# EAGLE board board (EAGLE 8.3.1)
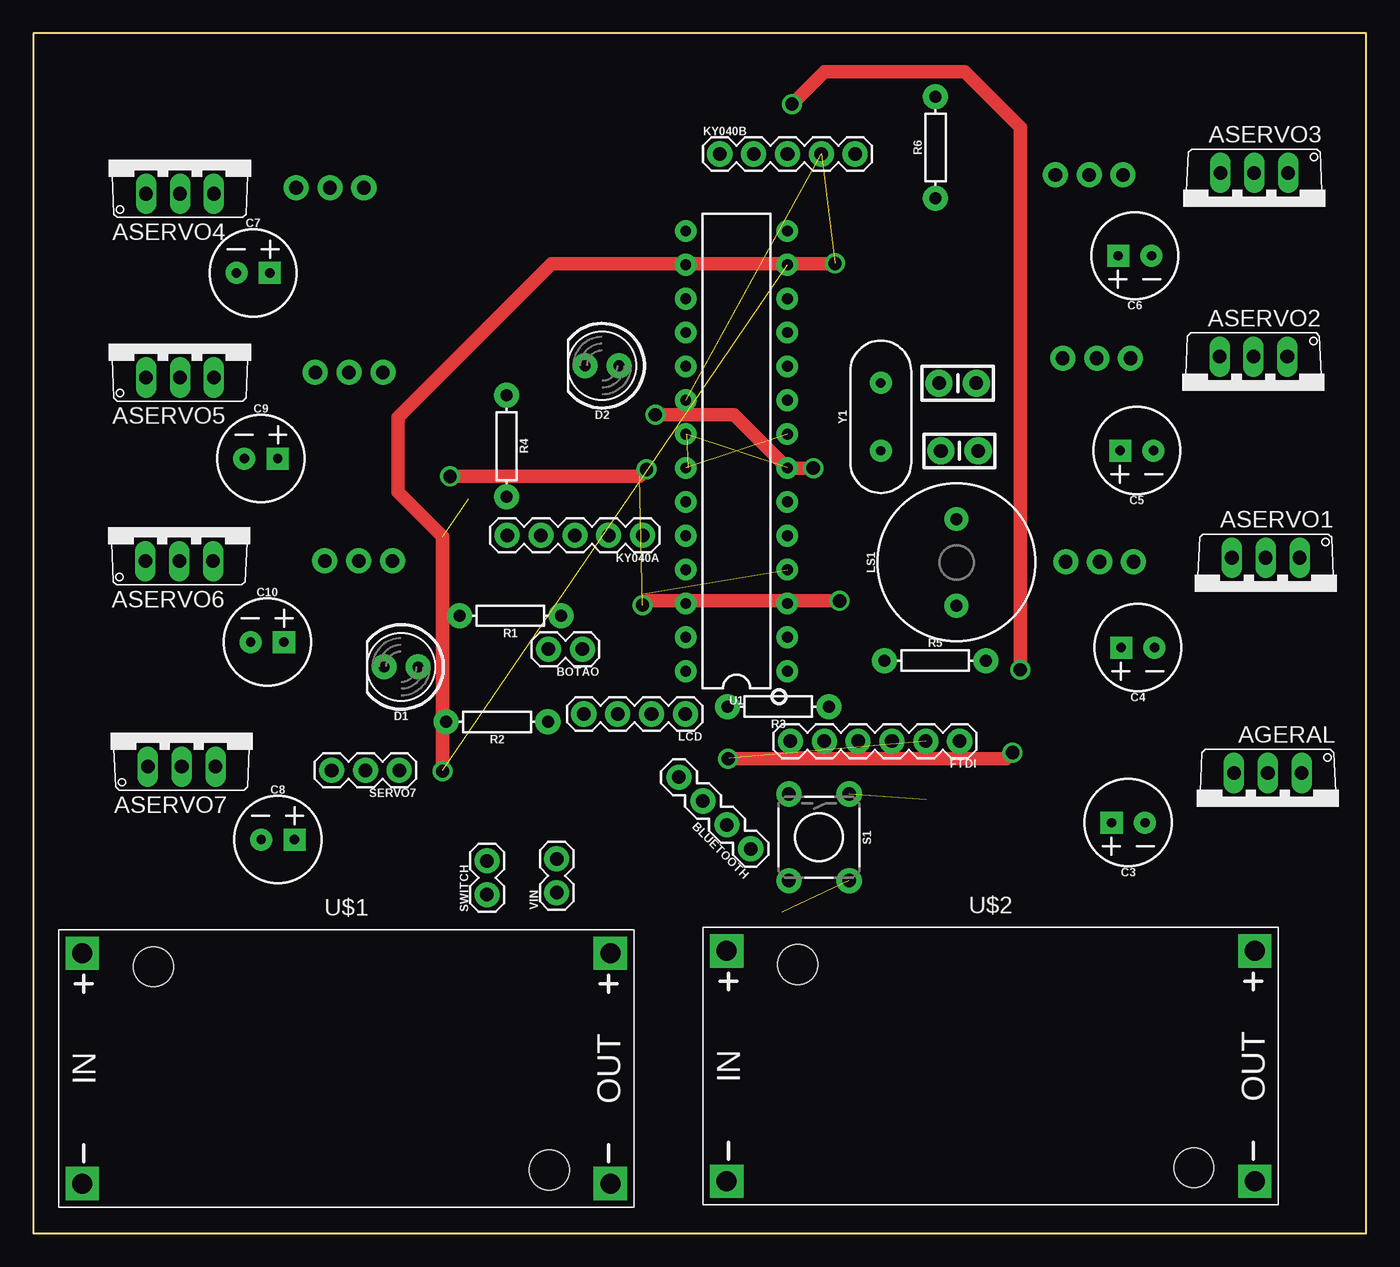
[diagram p0: board, top side]
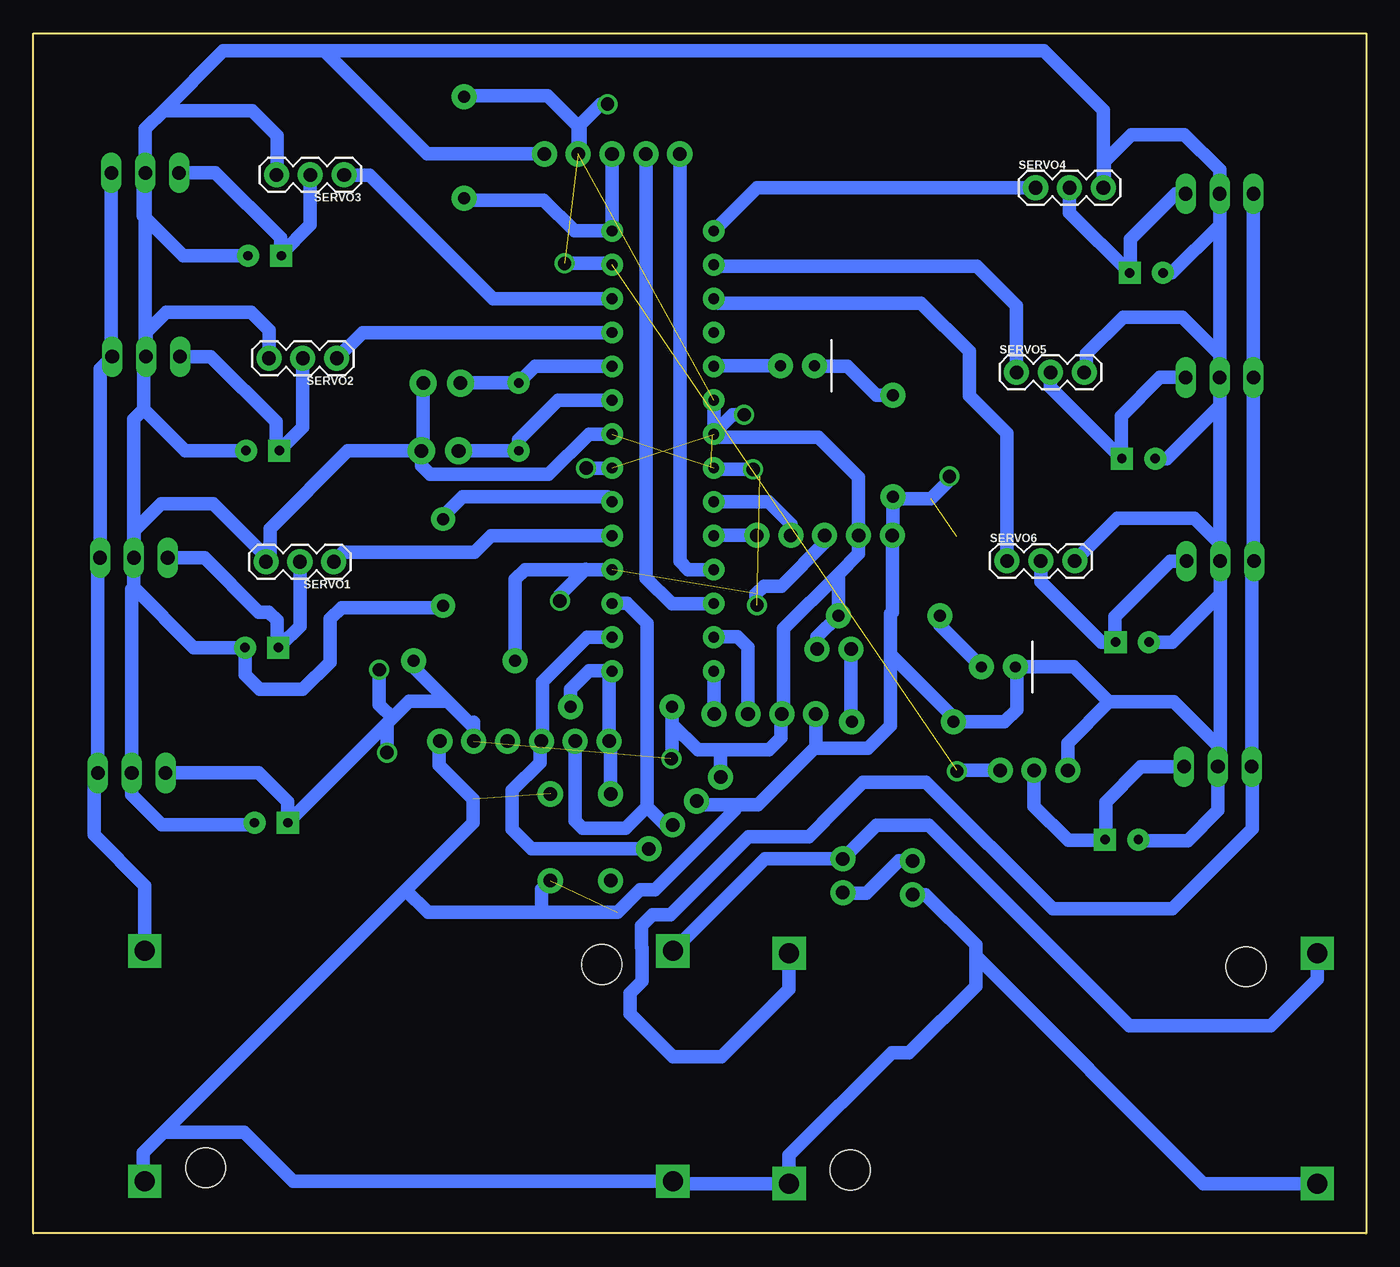
[diagram p1: board, bottom side, seen from below]

Size 100 x 90 mm. Coordinates in mm from the lower left corner, seen from the top.
Outline: 0,90 0,0 100,0 100,90 0,90
Copper layers (1*16): Top 0.035mm / dielectric 1.5mm / Bottom 0.035mm
Design rules "default": minimum track width 6mil, minimum drill 0.35mm, track to track 6mil, track to pad 6mil, pad to pad 6mil, via to via 6mil, smd to smd 6mil, copper to edge 40mil, drill to drill 6mil, minimum pad ring 10mil, minimum via ring 8mil, stop-mask expansion 4mil, vias tented up to drill 0mil, thermal gap 10mil

## Footprints (pad centres in the part's own frame; a part is rotated, then mirrored left to right if it is on the bottom)
TO220V = drill 1.016 long: 1 -2.54,-2.54; 2 0,-2.54; 3 2.54,-2.54
1X04 = drill 1.016 pad 1.88: 1 0,0; 2 2.54,0; 3 5.08,0; 4 7.62,0
1X02 = drill 1.016 pad 1.88: 1 0,0; 2 2.54,0
CAP-PTH-SMALL-KIT = drill 1.016 pad 2.032: 1 -1.397,0; 2 1.397,0
CPOL-RADIAL-2.5MM-6.5MM = drill 0.7 pad 1.651 square: 1 1.25,0 | drill 0.7 pad 1.651: 2 -1.25,0
LED_5MM = drill 0.813 pad 1.88: A -1.27,0; K 1.27,0
1X06 = drill 1.016 pad 1.88: 1 0,0; 2 2.54,0; 3 5.08,0; 4 7.62,0; 5 10.16,0; 6 12.7,0
1X05 = drill 1.016 pad 1.88: 1 0,0; 2 2.54,0; 3 5.08,0; 4 7.62,0; 5 10.16,0
BUZZER-12MM = drill 0.9 pad 1.778: + 3.25,0; - -3.25,0
AXIAL-0.3 = drill 0.9 pad 1.88: P$1 -3.81,0; P$2 3.81,0
TACTILE_SWITCH_PTH_6.0MM = drill 1.016 pad 1.88: 1 -3.251,2.261; 2 3.251,2.261; 3 -3.251,-2.261; 4 3.251,-2.261
1X03 = drill 1.016 pad 1.88: 1 0,0; 2 2.54,0; 3 5.08,0
DIP28 = drill 0.813 pad 1.626: 1 -16.51,-3.81; 2 -13.97,-3.81; 3 -11.43,-3.81; 4 -8.89,-3.81; 5 -6.35,-3.81; 6 -3.81,-3.81; 7 -1.27,-3.81; 8 1.27,-3.81; 9 3.81,-3.81; 10 6.35,-3.81; 11 8.89,-3.81; 12 11.43,-3.81; 13 13.97,-3.81; 14 16.51,-3.81; 15 16.51,3.81; 16 13.97,3.81; 17 11.43,3.81; 18 8.89,3.81; 19 6.35,3.81; 20 3.81,3.81; 21 1.27,3.81; 22 -1.27,3.81; 23 -3.81,3.81; 24 -6.35,3.81; 25 -8.89,3.81; 26 -11.43,3.81; 27 -13.97,3.81; 28 -16.51,3.81
DC-DC-STEP-DOWN-LM2596 = drill 1.5 pad 2.5 square: IN+ -19.812,8.636; IN- -19.812,-8.636; OUT+ 19.812,8.636; OUT- 19.812,-8.636 | hole 3: -14.478,7.62; 15.24,-7.62
HC49US = drill 0.7 pad 1.651: 1 -2.54,0; 2 2.54,0

## Placement (x,y rotation side)
AGERAL  788TV  [TO220V]  92.62,31.99 180 top
ASERVO1  788TV  [TO220V]  92.46,48.13 180 top
ASERVO2  788TV  [TO220V]  91.54,63.21 180 top
ASERVO3  788TV  [TO220V]  91.6,77 180 top
ASERVO4  788TV  [TO220V]  11,80.51 0 top
ASERVO5  788TV  [TO220V]  11,66.73 0 top
ASERVO6  788TV  [TO220V]  10.95,52.95 0 top
ASERVO7  788TV  [TO220V]  11.13,37.54 0 top
BLUETOOTH  [1X04]  53.82,28.83 135 top
BOTAO  [1X02]  41.19,43.81 180 top
C1  0.1uF  [CAP-PTH-SMALL-KIT]  69.49,58.68 180 top
C2  0.1uF  [CAP-PTH-SMALL-KIT]  69.35,63.77 0 top
C3  100uF  [CPOL-RADIAL-2.5MM-6.5MM]  82.15,30.8 180 top
C4  100uF  [CPOL-RADIAL-2.5MM-6.5MM]  82.87,43.93 180 top
C5  100uF  [CPOL-RADIAL-2.5MM-6.5MM]  82.79,58.71 180 top
C6  100uF  [CPOL-RADIAL-2.5MM-6.5MM]  82.64,73.32 180 top
C7  100uF  [CPOL-RADIAL-2.5MM-6.5MM]  16.49,72.03 0 top
C8  100uF  [CPOL-RADIAL-2.5MM-6.5MM]  18.34,29.53 0 top
C9  100uF  [CPOL-RADIAL-2.5MM-6.5MM]  17.08,58.11 0 top
C10  100uF  [CPOL-RADIAL-2.5MM-6.5MM]  17.55,44.34 0 top
D1  [LED_5MM]  27.59,42.48 180 top
D2  [LED_5MM]  42.67,65.07 180 top
FTDI  [1X06]  69.5,36.92 180 top
KY040A  [1X05]  45.71,52.35 180 top
KY040B  [1X05]  51.5,80.95 0 top
LCD  [1X04]  48.92,38.95 180 top
LS1  BUZZER-PTH  [BUZZER-12MM]  69.26,50.32 90 top
R1  330  [AXIAL-0.3]  35.79,46.32 180 top
R2  330  [AXIAL-0.3]  34.79,38.36 180 top
R3  330  [AXIAL-0.3]  55.89,39.51 180 top
R4  330  [AXIAL-0.3]  35.51,59.04 270 top
R5  1k  [AXIAL-0.3]  67.66,42.96 0 top
R6  1k  [AXIAL-0.3]  67.69,81.43 90 top
S1  MOMENTARY-SWITCH-SPST-PTH-6.0MM  [TACTILE_SWITCH_PTH_6.0MM]  58.95,29.7 270 top
SERVO1  455-1750-1-ND  [1X03]  77.46,50.37 180 bottom
SERVO2  455-1750-1-ND  [1X03]  77.24,65.63 180 bottom
SERVO3  455-1750-1-ND  [1X03]  76.68,79.39 180 bottom
SERVO4  455-1750-1-ND  [1X03]  24.8,78.42 0 bottom
SERVO5  455-1750-1-ND  [1X03]  26.23,64.57 0 bottom
SERVO6  455-1750-1-ND  [1X03]  26.95,50.43 0 bottom
SERVO7  455-1750-1-ND  [1X03]  27.46,34.72 180 top
SWITCH  [1X02]  34.04,25.4 90 top
U1  328P  [DIP28]  52.76,58.67 90 top
U$1  DC-DC-STEP-DOWN-LM2596  [DC-DC-STEP-DOWN-LM2596]  23.48,12.37 0 top
U$2  DC-DC-STEP-DOWN-LM2596  [DC-DC-STEP-DOWN-LM2596]  71.83,12.54 0 top
VIN  [1X02]  39.27,25.55 90 top
Y1  [HC49US]  63.58,61.24 90 top

## Library data of the parts
AGERAL ASERVO1-ASERVO7 = linear
BLUETOOTH LCD = SparkFun-Connectors; PROD_ID: CONN-09696
BOTAO KY040A KY040B SWITCH VIN = SparkFun-Connectors
C1 C2 = SparkFun-Capacitors; PROD_ID: CAP-08370
C3-C10 = SparkFun-Capacitors; PROD_ID: CAP-08439
D1 D2 = SparkFun-LED
FTDI = SparkFun-Connectors; PROD_ID: CONN-08437
LS1 = SparkFun-Electromechanical; PROD_ID: COMP-08253; SF_SKU: COM-07950
R1-R4 = SparkFun-Resistors; PROD_ID: RES-8371
R5 R6 = SparkFun-Resistors; PROD_ID: RES-12182
S1 = SparkFun-Switches; PROD_ID: SWCH-08441; SF_SKU: COM-00097
SERVO1-SERVO7 = SparkFun-Connectors; PROD_ID: XXX-00000
U1 = SparkFun-IC-Microcontroller; PROD_ID: IC-09136
U$1 U$2 = diy-modules
Y1 = SparkFun-Clocks

## Nets
5VA: ASERVO1.3 C4.1 SERVO1.2
5VB: ASERVO2.3 C5.1 SERVO2.2
5VC: ASERVO3.3 C6.1 SERVO3.2
5VD: ASERVO4.3 C7.1 SERVO4.2
5VE: ASERVO5.3 C9.1 SERVO5.2
5VF: ASERVO6.3 C10.1 SERVO6.2
5VG: AGERAL.3 BLUETOOTH.4 BOTAO.1 C3.1 FTDI.2 KY040A.4 KY040B.4 LCD.3 R1.P$1 R3.P$2 R5.P$2 R6.P$2 U1.7 U1.20 U1.21
5VH: ASERVO7.3 C8.1 SERVO7.2
12V: U$1.IN+ U$2.IN+ VIN.2
12VA: AGERAL.1 ASERVO1.1 ASERVO2.1 ASERVO3.1 U$2.OUT+
12VB: ASERVO4.1 ASERVO5.1 ASERVO6.1 ASERVO7.1 U$1.OUT+
A0: KY040A.2 U1.23
A1: KY040A.1 U1.24
A2: KY040B.1 U1.25
A3: KY040B.2 U1.26
CRISTAL1: C1.2 U1.9 Y1.1
CRISTAL2: C2.1 U1.10 Y1.2
DIG3: KY040A.3 R5.P$1 U1.4
DIG4: KY040B.3 R6.P$1 U1.14
DIG5: LS1.+ U1.6
DIG6: BOTAO.2 R2.P$1
DIG7: SERVO7.1 U1.13
GND: AGERAL.2 ASERVO1.2 ASERVO2.2 ASERVO3.2 ASERVO4.2 ASERVO5.2 ASERVO6.2 ASERVO7.2 BLUETOOTH.3 C1.1 C2.2 C3.2 C4.2 C5.2 C6.2 C7.2 C8.2 C9.2 C10.2 D1.K FTDI.1 KY040A.5 KY040B.5 LCD.4 LS1.- R2.P$2 R4.P$2 S1.1 SERVO1.3 SERVO2.3 SERVO3.3 SERVO4.3 SERVO5.3 SERVO6.3 SERVO7.3 SWITCH.1 U1.8 U1.22 U$1.IN- U$1.OUT- U$2.IN- U$2.OUT-
GNDC: SWITCH.2 VIN.1
MISO: U1.18
N$2: D1.A R1.P$2
N$4: D2.K R4.P$1
PWM1: SERVO1.1 U1.5
PWM2: SERVO2.1 U1.11
PWM3: SERVO3.1 U1.12
PWM4: SERVO4.1 U1.15
PWM5: SERVO5.1 U1.16
PWM6: SERVO6.1 U1.17
RESET: FTDI.6 R3.P$1 S1.3 U1.1
RX: BLUETOOTH.1 FTDI.4 U1.2
SCK: D2.A U1.19
SCL: LCD.1 U1.28
SDA: LCD.2 U1.27
TX: BLUETOOTH.2 FTDI.5 U1.3

## Tracks (layer width: path | path; a pad name or v marks a point on that pad's centre or on a via)
5VA
  Bottom 1.016: SERVO1.2 80,45.55 81.45,44.1 | 81.45,44.1 C4.1 | ASERVO1.3 87.16,50.67 83.09,46.6 82.33,46.6 81.71,45.98 81.71,44.36 81.45,44.1
5VB
  Bottom 1.016: SERVO2.2 79.78,60.47 C5.1 81.8,58.97 81.8,60.86 86.69,65.75 ASERVO2.3
5VC
  Bottom 1.016: ASERVO3.3 86.35,79.54 81.46,74.65 81.46,73.39 | 81.46,73.39 C6.1 | SERVO3.2 79.22,75.63 81.46,73.39
5VD
  Bottom 1.016: ASERVO4.3 14.28,77.97 17.69,74.56 17.69,72.08 C7.1 22.26,76.55 SERVO4.2
5VE
  Bottom 1.016: ASERVO5.3 15.47,64.19 18.36,61.3 18.36,58.14 | 18.36,58.14 C9.1 | SERVO5.2 23.69,63.47 18.36,58.14
5VF
  Bottom 1.016: ASERVO6.3 14.7,50.41 18.85,46.26 18.85,44.39 C10.1 19.88,44.34 24.4,48.86 SERVO6.2
5VG  (3 unrouted)
  Bottom 1.016: AGERAL.3 90.05,34.56 83.1,34.56 80.9,32.36 C3.1 71.79,39.91 68.91,39.91 | 39.6,49.45 43.71,45.34 43.71,39.08 LCD.3 43.92,38.87 43.92,37.16 44.82,36.26 48.52,36.26 | 66.96,37.96 66.96,38.32 | U1.20 U1.21 48.7,59.69 41.08,59.69 38.09,56.7 KY040A.4 38.09,50.96 39.6,49.45 | KY040B.4 59.12,83.02 61.42,85.32 67.61,85.32 R6.P$2 | 48.52,36.26 50.15,36.26 52.08,38.19 R3.P$2 52.08,35.77 52.21,35.64 | 39.6,49.45 R1.P$1 41.19,44.73 BOTAO.1 | FTDI.2 66.96,37.96 | 66.96,37.96 68.91,39.91 | R5.P$2 71.47,42.47 68.91,39.91 | BLUETOOTH.4 48.44,36.18 48.52,36.26
5VH
  Bottom 1.016: ASERVO7.3 16.89,35 19.55,32.34 19.55,29.57 C8.1 19.64,29.48 22.36,29.48 24.92,32.04 SERVO7.2
12V
  Bottom 1.016: VIN.2 39.27,28.27 | VIN.2 45.1,28.09 U$2.IN+ | U$1.IN+ 3.67,19.06 7.16,15.57 17.76,15.57 32.79,30.6 35.67,30.6 | 35.67,30.6 36.72,30.6 | 35.67,30.6 36.76,30.6 VIN.2
12VA
  Bottom 1.016: ASERVO3.1 94.14,65.81 ASERVO2.1 95,64.83 ASERVO1.1 95.16,50.51 AGERAL.1 95.44,34.25 95.44,29.88 91.64,26.08 U$2.OUT+
12VB
  Bottom 1.016: ASERVO4.1 ASERVO5.1 8.46,50.46 ASERVO6.1 8.59,50.23 ASERVO7.1 8.53,34.94 8.53,30.35 14.54,24.34 23.52,24.34 33.02,33.84 37.75,33.84 40.72,30.87 40.72,30.85 41.82,29.75 46.34,29.75 52.2,23.89 53.56,23.89 54.38,23.07 54.38,21.46 54.33,21.41 54.33,18.91 55.23,18 55.23,16.47 52,13.24 48.36,13.24 43.29,18.31 U$1.OUT+
A0
  Bottom 1.016: KY040A.2 43.17,53.2 44.84,54.87 U1.23
A1
  Bottom 1.016: KY040A.1 48.92,52.35 U1.24
A2
  Bottom 1.016: KY040B.1 51.5,50.41 50.87,49.78 U1.25
A3
  Bottom 1.016: KY040B.2 54.04,49.15 52.1,47.21 48.98,47.21 U1.26
CRISTAL1
  Bottom 1.016: U1.9 60.65,62.48 63.6,59.53 63.6,58.72 Y1.1 68.07,58.7 C1.2
CRISTAL2
  Bottom 1.016: U1.10 62.34,65.02 Y1.2 C2.1
DIG3  (1 unrouted)
  Bottom 1.016: U1.4 63.12,49.78 63.85,49.05 R5.P$1 | KY040A.3 40.63,51.8 43.88,48.55 45.18,48.55 45.77,47.96 45.77,47.28 45.73,47.24
DIG4
  Bottom 1.016: R6.P$1 67.57,77.5 61.71,77.5 59.39,75.18 U1.14 KY040B.3
DIG5
  Bottom 1.016: LS1.+ 69.26,53.79 67.81,55.24 56.95,55.24 U1.6
DIG6
  Bottom 1.016: BOTAO.2 38.65,38.41 R2.P$1
DIG7  (1 unrouted)
  Bottom 1.016: SERVO7.1 30.69,34.72 30.71,34.7
GND  (3 unrouted)
  Bottom 1.016: U$1.IN- 12.22,3.73 29.3,20.81 | 29.3,20.81 29.3,21.64 33.06,25.4 SWITCH.1 | 29.3,20.81 29.3,18.55 34.29,13.56 35.58,13.56 43.29,5.85 U$1.OUT- 52.75,3.73 52.91,3.89 52.03,3.89 U$2.IN- 80.5,3.9 84.19,7.59 90.21,7.59 | 90.21,7.59 91.75,6.05 91.75,4.01 U$2.OUT- | 11,75.61 ASERVO5.2 | 11,75.61 ASERVO4.2 11,79.76 13.65,82.41 17.62,82.41 19.65,80.38 19.65,78.49 SERVO4.3 19.72,84.24 24.17,88.69 78.2,88.69 | C7.2 14.58,72.03 11,75.61 | 11,62.08 ASERVO5.2 | 11,62.08 11,50.46 ASERVO6.2 | 10.95,47.92 ASERVO6.2 | 10.95,47.92 10.95,35.18 ASERVO7.2 | ASERVO7.2 11.13,31.72 13.4,29.45 17.01,29.45 C8.2 | ASERVO5.2 11,65.91 13.81,68.72 18.22,68.72 20.98,65.96 20.98,64.74 SERVO5.3 | C9.2 14.97,58.11 11,62.08 | ASERVO6.2 10.95,51.67 12.9,53.62 18.68,53.62 SERVO6.3 | C10.2 14.53,44.34 10.95,47.92 | ASERVO7.2 11.13,36.56 14.43,39.86 19.3,39.86 | 19.3,39.86 22.4,36.76 22.4,34.74 SERVO7.3 | ASERVO3.2 91.6,82.83 90.22,84.21 | 90.22,84.21 83.6,84.21 81.7,82.31 81.7,79.45 SERVO3.3 | C6.2 88.74,73.32 91.74,76.32 91.74,79.4 ASERVO3.2 | SERVO2.3 82.32,67.74 83.67,69.09 90.03,69.09 91.53,67.59 ASERVO2.2 | ASERVO2.2 91.7,65.59 91.7,61.81 | C5.2 88.6,58.71 91.7,61.81 | ASERVO1.2 92.43,50.7 92.43,52.69 90.41,54.71 86.49,54.71 82.54,50.76 SERVO1.3 82.24,50.67 82.24,52.85 76.41,58.68 C1.1 | 92.48,48.46 87.95,43.93 C4.2 84.12,41.9 83.01,40.79 79.78,40.79 77.72,42.85 77.72,46.08 76.87,46.93 69.4,46.93 LS1.- | 92.48,48.46 92.48,50.65 ASERVO1.2 | C3.2 83.54,30.66 90.37,30.66 92.62,32.91 AGERAL.2 92.62,48.32 92.48,48.46 | ASERVO3.2 91.6,65.83 ASERVO2.2 | ASERVO1.2 92.46,61.05 91.7,61.81 | C2.2 70.75,58.82 C1.1
  Bottom 1.016: FTDI.1 69.55,36.87 69.55,35.11 67.02,32.58 67.02,30.78 72.05,25.75 | 78.2,88.69 85.74,88.69 90.22,84.21 | LCD.4 41.3,36.5 | R4.P$2 35.51,52.39 KY040A.5 35.56,46.6 35.7,46.46 35.7,43.42 | 19.3,39.86 21.92,42.48 D1.K 26.22,42.38 26.22,39.27 27.13,38.36 R2.P$2 30.98,38.7 35.7,43.42 | 35.7,43.42 35.7,38.07 37.4,36.37 41.17,36.37 41.3,36.5 | 72.05,25.75 90.21,7.59 | KY040B.5 70.46,80.95 78.2,88.69 | U1.8 58.32,59.94 61.34,56.92 70.23,56.92 70.87,57.56 70.87,58.66 C1.1 | 41.3,36.5 45.64,32.16 47.41,32.16 | 47.41,32.16 49.97,32.16 BLUETOOTH.3 | 47.41,32.16 47.41,31.72 53.36,25.77 54.48,25.77 56.16,24.09 70.4,24.09 72.05,25.75 | 61.86,24.09 61.86,25.8 61.21,26.45
GNDC
  Bottom 1.016: SWITCH.2 35.06,27.94 37.48,25.52 39.24,25.52 VIN.1
N$1  (via drill 1)  (4 unrouted)
  Top 1.016: v46.67,61.39 52.57,61.39 56.57,57.39 v58.52,57.39 | v31.27,56.77 45.48,56.77 v46,57.29 | v30.71,34.66 30.71,52.23 27.37,55.57 27.37,61.21 38.87,72.71 60.1,72.71 v60.14,72.75 | v74.04,42.27 74.04,82.97 69.9,87.11 59.34,87.11 v56.92,84.69 | v52.13,35.59 73,35.59 v73.47,36.06
  Bottom 1.016: v58.52,57.39 56.63,57.39 56.55,57.31 | v46.67,61.39 47.55,61.39 49.05,59.89 | v46,57.29 49.01,57.29 49.14,57.42 | v31.27,56.77 31.27,56.47 32.64,55.1 35.48,55.1 35.54,55.16 | v60.14,72.75 56.67,72.75 56.49,72.57 | v56.92,84.69 57.45,84.69 59,83.14 59,81.1 59.14,80.96 | v73.47,36.06 73.47,38.26 73.06,38.67 74.04,39.65 v74.04,42.27
  other vias: 45.71,47.12
N$2
  Bottom 1.016: R1.P$2 31.98,45.6 D1.A
N$4
  Bottom 1.016: R4.P$1 36.74,62.85 38.92,65.03 41.36,65.03 D2.K
N$14  (via drill 1)
  Top 1.016: v60.49,47.43 46.11,47.43 45.76,47.08
  Bottom 1.016: v60.49,47.43 60.49,47.89 58.57,49.81
PWM1
  Bottom 1.016: U1.5 65.65,52.32 66.88,51.09 76.74,51.09 SERVO1.1
PWM2
  Bottom 1.016: U1.11 75.31,67.56 SERVO2.1
PWM3
  Bottom 1.016: U1.12 65.51,70.1 74.78,79.37 76.66,79.37 SERVO3.1
PWM4
  Bottom 1.016: SERVO4.1 45.71,78.42 U1.15
PWM5
  Bottom 1.016: SERVO5.1 26.23,69.58 29.2,72.55 48.86,72.55 U1.16
PWM6
  Bottom 1.016: SERVO6.1 26.95,60.01 29.77,62.83 29.77,66.14 33.39,69.76 48.61,69.76 U1.17
RESET
  Bottom 1.016: S1.3 56.69,36.81 FTDI.6 56.8,41.93 U1.1 56.62,42.21 58.31,42.21 59.7,40.82 R3.P$1
RX
  Bottom 1.016: U1.2 58.47,44.7 61.81,41.36 61.81,36.99 | FTDI.4 61.81,36.99 | BLUETOOTH.1 62.62,28.83 64.08,30.29 64.08,33.22 62,35.3 62,36.8 61.81,36.99
SCK
  Bottom 1.016: D2.A 48.9,65.07 U1.19
SCL
  Bottom 1.016: LCD.1 48.92,42.13 U1.28
SDA
  Bottom 1.016: LCD.2 46.38,43.94 47.17,44.73 48.92,44.73 U1.27
TX
  Bottom 1.016: FTDI.5 59.34,30.95 58.78,30.39 55.57,30.39 53.97,31.99 | 53.97,31.99 53.97,45.77 55.44,47.24 U1.3 | BLUETOOTH.2 52.61,30.63 53.97,31.99